# EAGLE board CDCEmu_Logic (EAGLE 9.6.2)
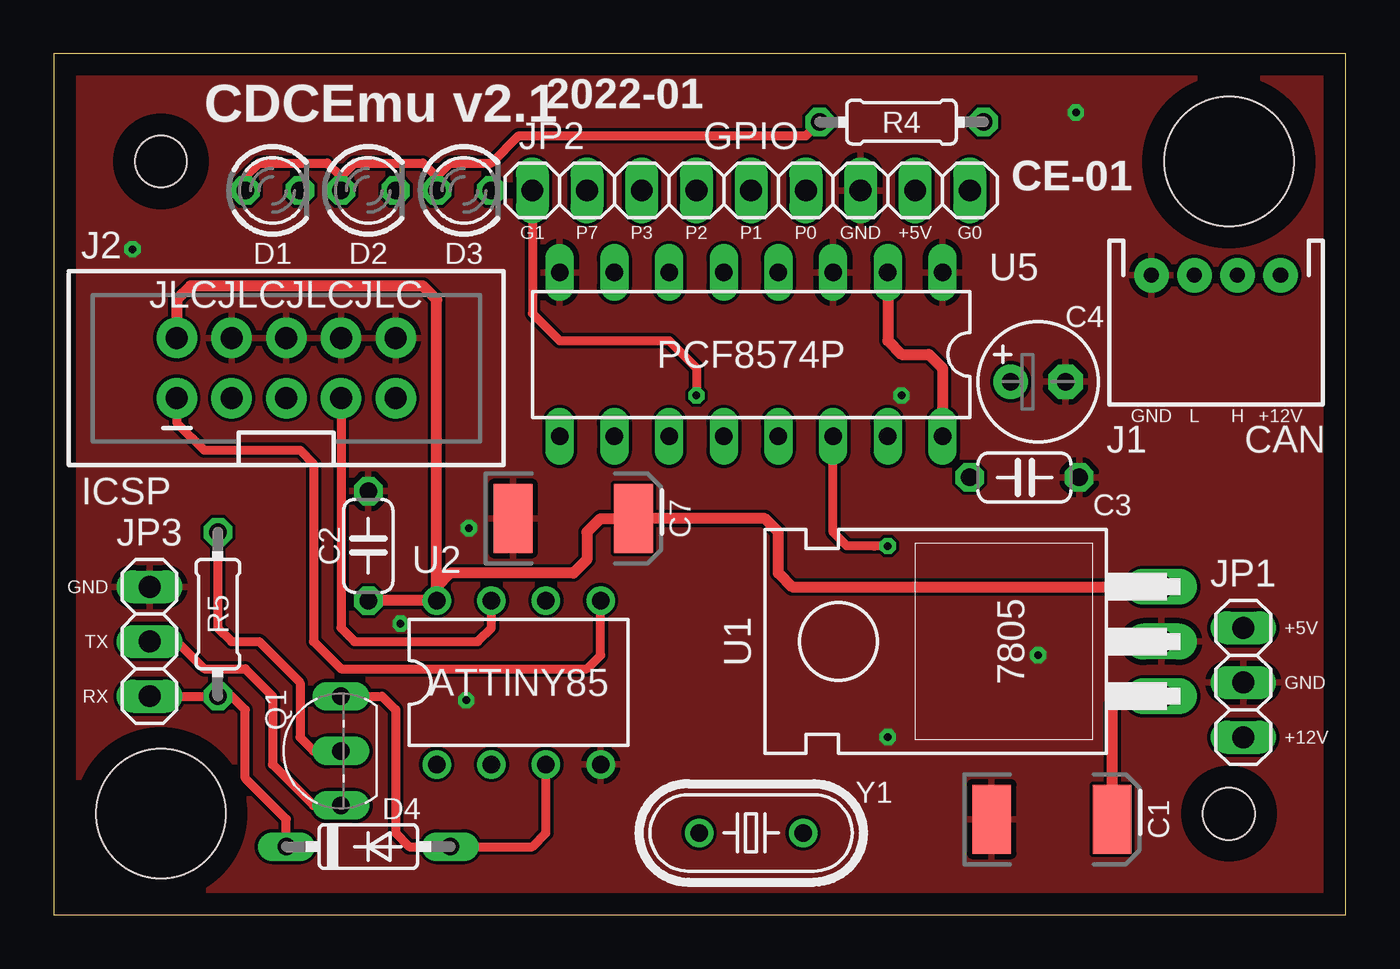
[diagram p0: board, top side]
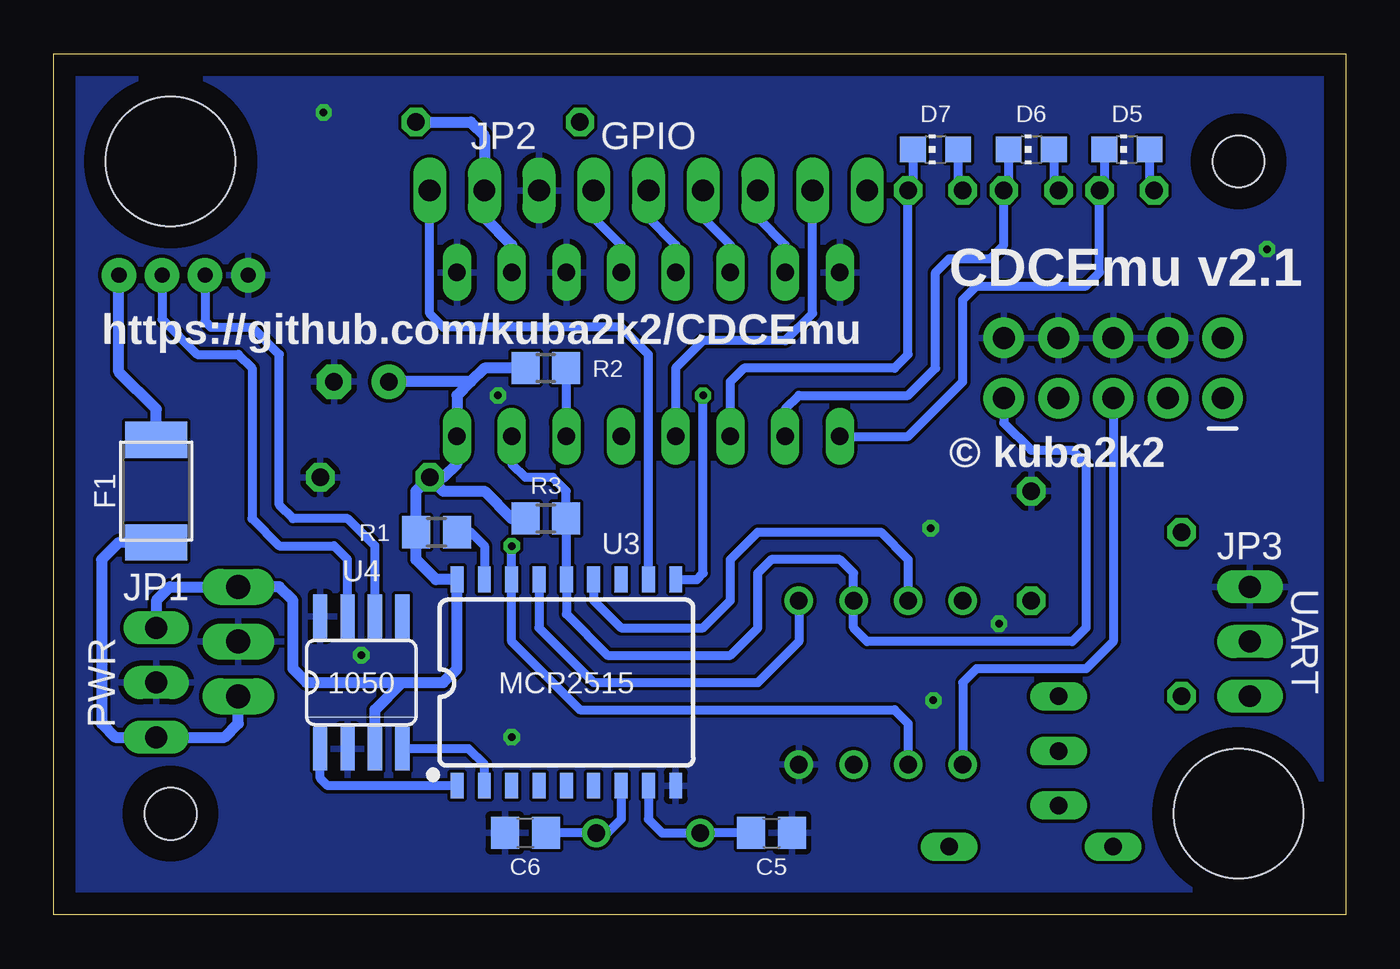
[diagram p1: board, bottom side, seen from below]

Size 60 x 40 mm. Coordinates in mm from the lower left corner, seen from the top.
Outline: 0,0 60,0 60,40 0,40 0,0
Copper layers (1*16): Top 0.035mm / dielectric 1.5mm / Bottom 0.035mm
Design rules "default *": minimum track width 6mil, minimum drill 0.35mm, track to track 6mil, track to pad 6mil, pad to pad 6mil, via to via 6mil, smd to smd 6mil, copper to edge 40mil, drill to drill 6mil, minimum pad ring 10mil, minimum via ring 8mil, stop-mask expansion 4mil, vias tented up to drill 16mil, thermal gap 10mil
Holes 6 mm at 4.97,4.7 54.58,35
Holes 2.4 mm at 4.97,35 54.58,4.7

## Footprints (pad centres in the part's own frame; a part is rotated, then mirrored left to right if it is on the bottom)
C2512-POL = smd 1.8 x 3.2: + -2.8,0; - 2.8,0
C050-024X044 = drill 0.813 octagon: 1 -2.54,0; 2 2.54,0
E2,5-6 = drill 0.813 pad 1.6: + -1.27,0 | drill 0.813 pad 1.6 octagon: - 1.27,0
C0805 = smd 1.3 x 1.5: 1 -0.95,0; 2 0.95,0
LED3MM = drill 0.813 octagon: A -1.27,0; K 1.27,0
DO35-7 = drill 0.813 long: A 3.81,0; C -3.81,0
CHIP-LED0805 = smd 1.2 x 1.2: A 0,-1.05; C 0,1.05
1812 = smd 1.676 x 2.896: 1 -2.388,0; 2 2.388,0
JST-4-PTH = drill 0.7 pad 1.6: 1 -3,0; 2 -1,0; 3 1,0; 4 3,0
2X5-SHROUDED_LOCK = drill 1.016 pad 1.88: 1 -1.397,5.08; 2 1.397,5.08; 3 -1.397,2.54; 4 1.397,2.54; 5 -1.397,0; 6 1.397,0; 7 -1.397,-2.54; 8 1.397,-2.54; 9 -1.397,-5.08; 10 1.397,-5.08
1X03 = drill 1.016 long: 1 -2.54,0; 2 0,0; 3 2.54,0
1X09 = drill 1.016 long: 1 -10.16,0; 2 -7.62,0; 3 -5.08,0; 4 -2.54,0; 5 0,0; 6 2.54,0; 7 5.08,0; 8 7.62,0; 9 10.16,0
TO92-EBC = drill 0.813 long: B 0,-1.27; C -2.54,-1.27; E 2.54,-1.27
R0805 = smd 1.3 x 1.5: 1 -0.95,0; 2 0.95,0
0204/7 = drill 0.813 octagon: 1 -3.81,0; 2 3.81,0
TO220H-NOHOLE = drill 1.118 long: 1 -2.54,-10.16; 2 0,-10.16; 3 2.54,-10.16
PDIP08_300MIL = drill 0.813: 1 -3.81,-3.81; 2 -1.27,-3.81; 3 1.27,-3.81; 4 3.81,-3.81; 5 3.81,3.81; 6 1.27,3.81; 7 -1.27,3.81; 8 -3.81,3.81
SO18W = smd 0.6 x 1.2: 1 -5.08,-4.788; 2 -3.81,-4.788; 3 -2.54,-4.788; 4 -1.27,-4.788; 5 0,-4.788; 6 1.27,-4.788; 7 2.54,-4.788; 8 3.81,-4.788; 9 5.08,-4.788; 10 5.08,4.788; 11 3.81,4.788; 12 2.54,4.788; 13 1.27,4.788; 14 0,4.788; 15 -1.27,4.788; 16 -2.54,4.788; 17 -3.81,4.788; 18 -5.08,4.788
SO08 = smd 0.66 x 2.032: 1 -1.905,-3.073; 2 -0.635,-3.073; 3 0.635,-3.073; 4 1.905,-3.073; 5 1.905,3.073; 6 0.635,3.073; 7 -0.635,3.073; 8 -1.905,3.073
DIL16 = drill 0.813 long: 1 -8.89,-3.81; 2 -6.35,-3.81; 3 -3.81,-3.81; 4 -1.27,-3.81; 5 1.27,-3.81; 6 3.81,-3.81; 7 6.35,-3.81; 8 8.89,-3.81; 9 8.89,3.81; 10 6.35,3.81; 11 3.81,3.81; 12 1.27,3.81; 13 -1.27,3.81; 14 -3.81,3.81; 15 -6.35,3.81; 16 -8.89,3.81
HC49U = drill 0.813: 1 -2.413,0; 2 2.413,0

## Placement (x,y rotation side)
C1  10u  [C2512-POL]  46.35,4.45 180 top
C2  100n  [C050-024X044]  14.61,17.14 90 top
C3  100n  [C050-024X044]  45.09,20.32 0 top
C4  10u  [E2,5-6]  45.72,24.77 0 top
C5  47p  [C0805]  26.67,3.81 0 bottom
C6  47p  [C0805]  38.1,3.81 180 bottom
C7  47u  [C2512-POL]  24.13,18.41 180 top
D1  [LED3MM]  10.16,33.66 0 top
D2  [LED3MM]  14.61,33.66 0 top
D3  [LED3MM]  19.05,33.66 0 top
D4  1N4148  [DO35-7]  14.61,3.17 0 top
D5  [CHIP-LED0805]  10.16,35.56 90 bottom
D6  [CHIP-LED0805]  14.61,35.56 90 bottom
D7  [CHIP-LED0805]  19.05,35.56 90 bottom
F1  500mA  [1812]  55.24,19.68 270 bottom
J1  CAN  [JST-4-PTH]  53.98,29.72 180 top
J2  ICSP  [2X5-SHROUDED_LOCK]  10.79,25.4 90 top
JP1  PWR  [1X03]  55.24,10.79 270 top
JP2  GPIO  [1X09]  32.38,33.66 180 top
JP3  UART  [1X03]  4.45,12.7 270 top
Q1  BC546A  [TO92-EBC]  12.06,7.62 90 top
R1  10k  [R0805]  42.23,17.78 0 bottom
R2  2.2k  [R0805]  37.15,25.4 180 bottom
R3  2.2k  [R0805]  37.15,18.41 180 bottom
R4  220  [0204/7]  39.37,36.83 0 top
R5  10k  [0204/7]  7.62,13.97 90 top
U1  7805  [TO220H-NOHOLE]  41.27,12.7 90 top
U2  ATTINY85  [PDIP08_300MIL]  21.59,10.79 0 top
U3  MCP2515  [SO18W]  36.2,10.79 0 bottom
U4  1050  [SO08]  45.72,10.79 0 bottom
U5  PCF8574P  [DIL16]  32.38,26.04 180 top
Y1  8MHz  [HC49U]  32.38,3.81 0 top

## Library data of the parts
C1 C7 U1 = custom
C2-C6 = rcl; SPICEPREFIX: C
D1-D3 D5-D7 = led
D4 = diode
F1 = SparkFun-Fuses; PROD_ID: RES-14390
J1 = SparkFun-Connectors; PROD_ID: WIRE-13531; SF_ID: PRT-09916
J2 = SparkFun-Connectors; PROD_ID: CONN-08671; SF_ID: PRT-08506
JP1-JP3 = pinhead
Q1 = transistor-npn
R1-R5 = rcl; SPICEPREFIX: R
U2 = attinyx5
U3 = SparkFun-IC-Comms; PROD_ID: IC-09906
U4 = can_driver
U5 = i2c
Y1 = SparkFun-Clocks

## Nets
+5V: C2.1 C3.1 C4.+ C7.+ J2.2 JP1.1 JP2.2 R1.1 R2.2 R3.2 R4.2 U1.3 U2.8 U3.18 U4.3 U5.2 U5.16
+12V: C1.+ F1.2 JP1.3 U1.1
CANH: J1.2 U4.7
CANL: J1.3 U4.6
CANOSC1: C5.1 U3.8 Y1.1
CANOSC2: C6.1 U3.7 Y1.2
CANRST: R1.2 U3.17
CANRX: U3.2 U4.4
CANTX: U3.1 U4.1
G0: JP2.1 U3.11
G1: JP2.9 U3.10
GND: C1.- C2.2 C3.2 C4.- C5.2 C6.2 C7.- J1.4 J2.4 J2.6 J2.8 J2.10 JP1.2 JP2.3 JP3.1 U1.2 U2.4 U3.9 U4.2 U4.8 U5.1 U5.3 U5.8
LED_A: D1.A D2.A D3.A D5.A D6.A D7.A R4.1
P0: JP2.4 U5.4
P1: JP2.5 U5.5
P2: JP2.6 U5.6
P3: JP2.7 U5.7
P4: D1.K D5.C U5.9
P5: D2.K D6.C U5.10
P6: D3.K D7.C U5.11
P7: JP2.8 U5.12
PB0: J2.1 U2.5 U3.15
PB1: J2.9 R3.1 U2.6 U3.14 U5.15
PB2: J2.7 U2.7 U3.13
PB3: R2.1 U2.2 U3.16 U5.14
PB4: D4.A Q1.E U2.3
RST: J2.5 U2.1
RX: D4.C JP3.3 R5.1
TX: JP3.2 Q1.C
TXB: Q1.B R5.2
VIN: F1.1 J1.1

## Tracks (layer width: path | path; a pad name or v marks a point on that pad's centre or on a via)
+5V
  Top 0.508: 17.78,15.24 18.41,15.88 24.13,15.88 24.77,16.51 24.77,17.78 25.4,18.41 C7.+ 33.02,18.41 33.66,17.78 33.66,15.88 34.29,15.24 U1.3 | C2.1 U2.8 17.78,15.24 | 17.78,15.24 17.78,28.57 17.14,29.21 6.35,29.21 5.71,28.57 J2.2 | U5.2 38.73,26.67 39.37,26.04 40.64,26.04 41.27,25.4 U5.16
  Bottom 0.508: 43.81,10.79 48.26,10.79 48.9,11.43 48.9,14.61 49.53,15.24 U1.3 54.61,15.24 55.24,14.61 JP1.1 | U4.3 45.09,9.53 43.81,10.79 | 43.81,10.79 41.91,10.79 41.27,11.43 U3.18 | U3.18 41.27,15.88 | R1.1 43.18,16.51 42.25,15.58 U3.18 | R2.2 40.01,25.4 40.64,24.77 | 40.64,24.77 41.27,24.13 U5.16 41.27,20.95 41.91,20.32 C3.1 | R3.2 38.73,18.41 40.01,19.68 41.91,19.68 C3.1 | R1.1 43.17,18.42 | 40.64,24.77 C4.+ | R1.1 43.17,19.68 43.18,19.68 C3.1 | U5.2 38.73,31.11 40.01,32.38 JP2.2 40.01,36.2 40.64,36.83 R4.2
+12V
  Top 0.508: C1.+ 49.16,9.79 49.53,10.16 U1.1
  Bottom 0.508: F1.2 57,17.3 57.78,16.51 57.78,8.89 57.15,8.26 JP1.3 52.07,8.26 51.44,8.89 U1.1
CANH
  Bottom 0.406: U4.7 46.35,16.51 46.99,17.14 49.53,17.14 50.8,18.41 50.8,25.4 51.44,26.04 53.34,26.04 54.98,27.67 J1.2
CANL
  Bottom 0.406: U4.6 45.09,17.14 46.35,18.41 48.9,18.41 49.53,19.05 49.53,26.04 50.8,27.3 52.7,27.3 52.98,27.57 J1.3
CANOSC1
  Bottom 0.406: C5.1 Y1.1 31.75,3.81 32.38,4.45 U3.8
CANOSC2
  Bottom 0.406: U3.7 33.66,4.45 34.29,3.81 Y1.2 C6.1
CANRST
  Bottom 0.406: U3.17 40.01,17.14 40.64,17.78 R1.2
CANRX
  Bottom 0.406: U3.2 40.01,6.99 40.74,7.72 U4.4
CANTX
  Bottom 0.406: U3.1 47.28,6.01 47.62,6.35 U4.1
G0
  Bottom 0.406: JP2.1 42.55,27.94 41.91,27.3 33.66,27.3 32.38,26.04 U3.11
G1  (via drill 0.35)
  Top 0.406: JP2.9 22.23,27.94 23.5,26.67 28.57,26.67 29.84,25.4 v29.84,24.13
  Bottom 0.406: U3.10 30.14,15.58 29.84,15.88 v29.84,24.13
GND  (via drill 0.35)
  other vias: 3.66,30.92 45.72,12.06 19.28,17.97 47.47,37.27 19.15,9.97 16.1,13.52 38.73,8.26 39.37,24.13
  pour Bottom: 0,40 0,0 60,0 60,40
  pour Top: 0,0 60,0 60,40 0,40
LED_A
  Top 0.406: D1.A 8.89,34.29 9.53,34.92 12.7,34.92 13.34,34.29 | D2.A 13.34,34.29 | 13.34,34.29 13.97,34.92 17.14,34.92 17.78,34.29 | R4.1 34.92,36.2 21.59,36.2 20.32,34.92 18.41,34.92 17.78,34.29 | D3.A 17.78,34.29
  Bottom 0.406: D5.A 9.11,33.88 D1.A | D6.A 13.55,33.88 D2.A | D7.A 18,33.88 D3.A
P0
  Bottom 0.406: U5.4 33.66,31.11 34.92,32.38 JP2.4
P1
  Bottom 0.406: U5.5 31.11,31.11 32.38,32.38 JP2.5
P2
  Bottom 0.406: U5.6 28.57,31.11 29.84,32.38 JP2.6
P3
  Bottom 0.406: U5.7 26.04,31.11 27.3,32.38 JP2.7
P4
  Bottom 0.406: D5.C 11.21,33.88 D1.K 11.43,29.84 12.06,29.21 17.14,29.21 17.78,28.57 17.78,24.77 20.32,22.23 U5.9
P5
  Bottom 0.406: D6.C 15.65,33.88 D2.K 15.88,31.11 16.51,30.48 18.41,30.48 19.05,29.84 19.05,25.4 20.32,24.13 25.4,24.13 26.04,23.5 U5.10
P6
  Bottom 0.406: D7.C 20.1,33.88 D3.K 20.32,26.04 20.95,25.4 27.94,25.4 28.57,24.77 U5.11
P7
  Bottom 0.406: U5.12 31.11,25.4 29.84,26.67 26.04,26.67 24.77,27.94 JP2.8
PB0
  Top 0.406: J2.1 5.71,22.86 6.99,21.59 11.43,21.59 12.06,20.95 12.06,12.7 13.34,11.43 24.77,11.43 25.4,12.06 U2.5
  Bottom 0.406: U3.15 37.47,13.34 34.92,10.79 27.3,10.79 25.4,12.7 U2.5
PB1
  Bottom 0.406: J2.9 15.88,22.86 14.61,21.59 12.7,21.59 12.06,20.95 12.06,13.34 12.7,12.7 22.23,12.7 22.86,13.34 U2.6 22.86,15.88 23.5,16.51 26.67,16.51 27.3,15.88 27.3,13.34 28.57,12.06 34.29,12.06 36.2,13.97 U3.14 R3.1 36.2,19.69 36.83,20.32 38.1,20.32 38.73,20.95 U5.15
PB2
  Top 0.406: J2.7 13.34,13.34 13.97,12.7 19.68,12.7 20.32,13.34 U2.7
  Bottom 0.406: U3.13 34.92,14.61 33.66,13.34 29.84,13.34 28.57,14.61 28.57,16.51 27.3,17.78 21.59,17.78 20.32,16.51 U2.7
PB3  (via drill 0.35)
  Top 0.406: U5.14 36.2,17.78 36.83,17.14 38.1,17.14 38.11,17.13 v38.73,17.13
  Bottom 0.406: U2.2 20.32,8.89 20.95,9.53 35.56,9.53 38.73,12.7 U3.16 v38.73,17.13 | R2.1 U5.14
PB4
  Top 0.406: U2.3 22.86,3.81 22.23,3.17 D4.A 16.51,3.17 15.88,3.81 15.88,9.53 15.24,10.16 Q1.E
RST
  Bottom 0.406: J2.5 10.79,12.7 12.06,11.43 17.14,11.43 17.78,10.79 U2.1
RX
  Top 0.406: JP3.3 R5.1 8.26,10.16 8.89,9.53 8.89,6.35 10.79,4.45 D4.C
TX
  Top 0.406: JP3.2 5.71,12.7 6.99,11.43 8.89,11.43 10.16,10.16 10.16,6.99 12.06,5.08 Q1.C
TXB
  Top 0.406: Q1.B 12.06,7.62 11.43,8.26 11.43,10.79 9.53,12.7 8.26,12.7 7.62,13.34 R5.2
VIN
  Bottom 0.508: F1.1 55.24,23.5 56.98,25.23 J1.1

## Text on the board
tPlace: CDCEmu v2.1 | 2022-01 | CE-01 | G1 | P7 | P3 | P2 | P1 | P0 | GND | +5V | G0 | JLCJLCJLCJLC | GND | L | H | +12V | GND | TX | +5V | GND | RX | +12V
bPlace: CDCEmu v2.1 | https://github.com/kuba2k2/CDCEmu | © kuba2k2
bNames: GPIO | JP2 | JP3 | JP1 | UART